# Altium PCB PCB.PcbDoc
Units mm, origin at the board's own origin, x right, y up, seen from the top; angles counter-clockwise.
Board outline 72.01 x 57.28 mm, 2 copper layers (Top Layer, Bottom Layer); 29 components, 33 nets, 129 pads, 73 vias.
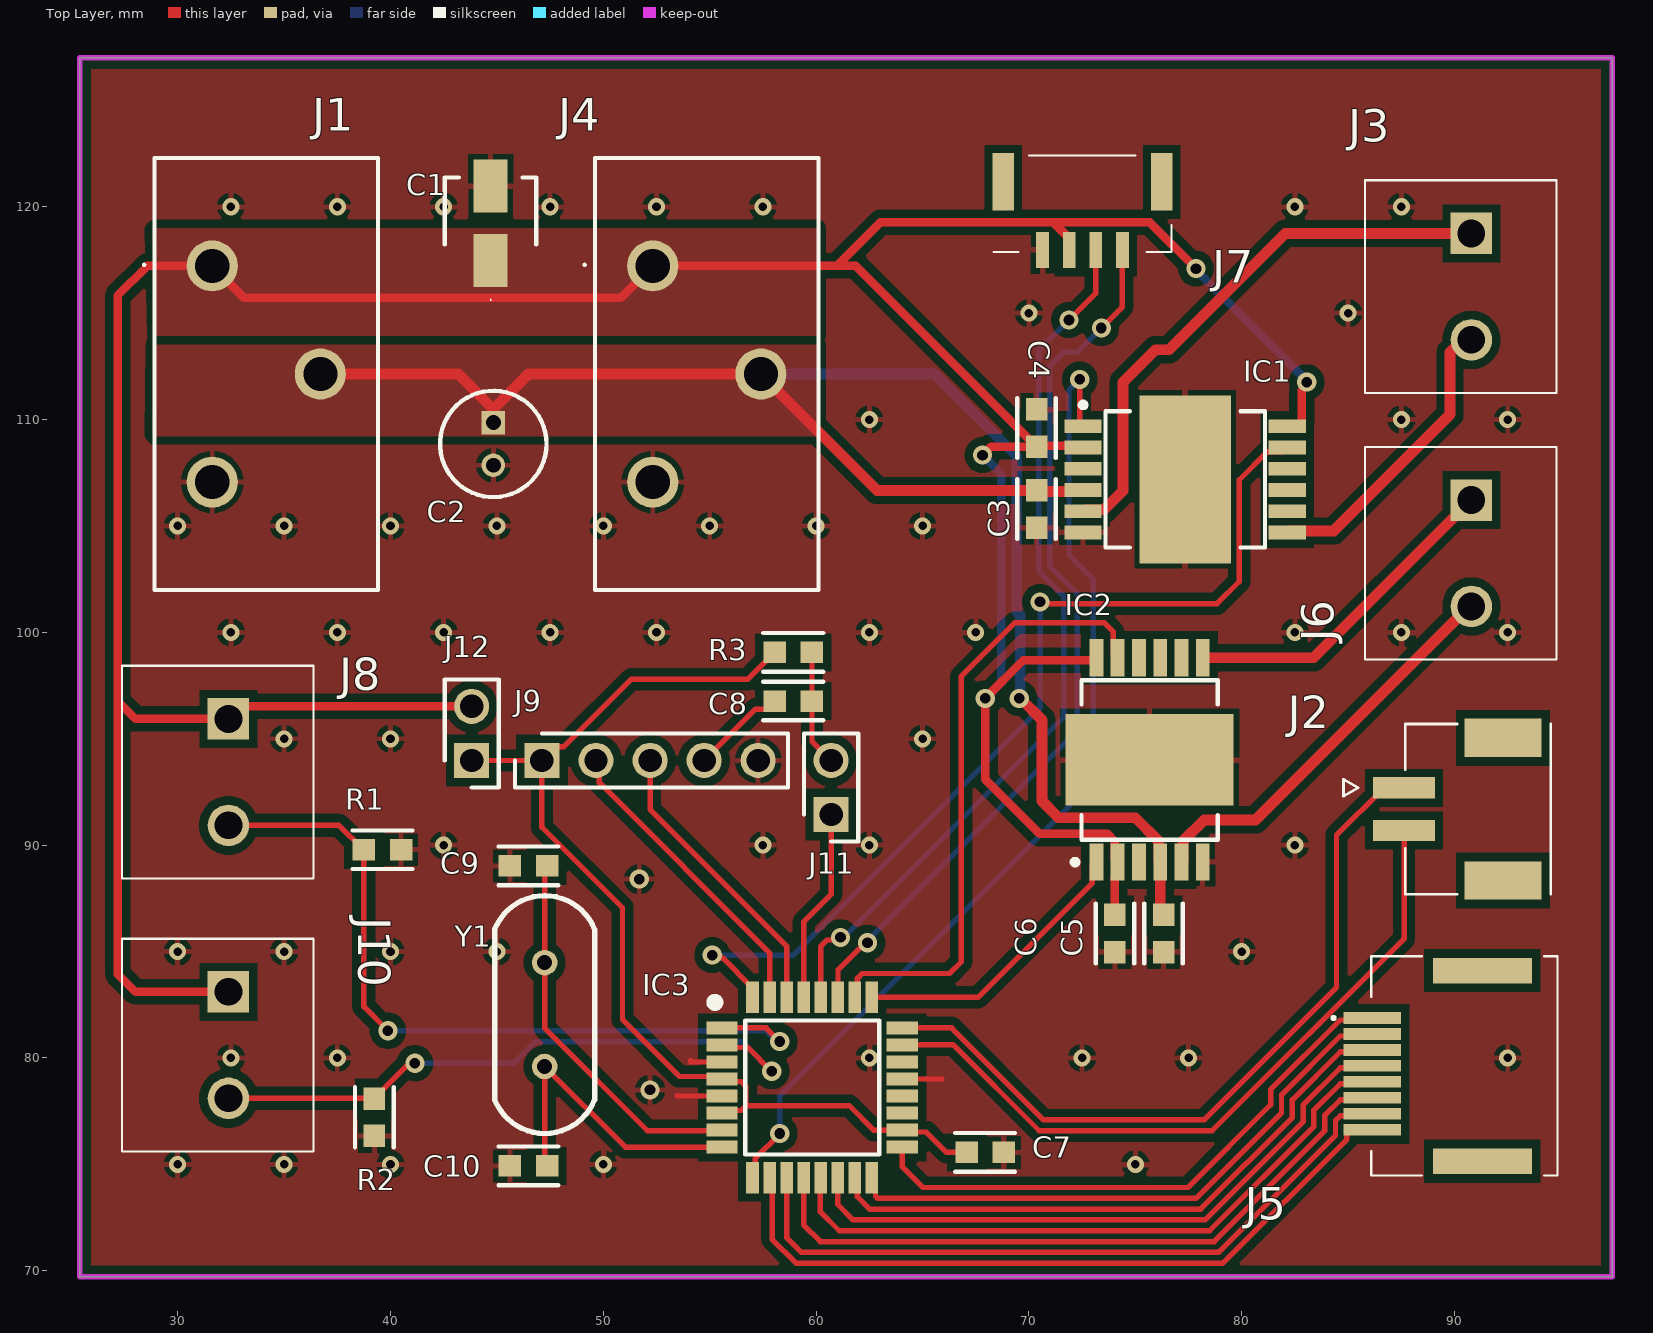
[diagram p0: Top Layer view]
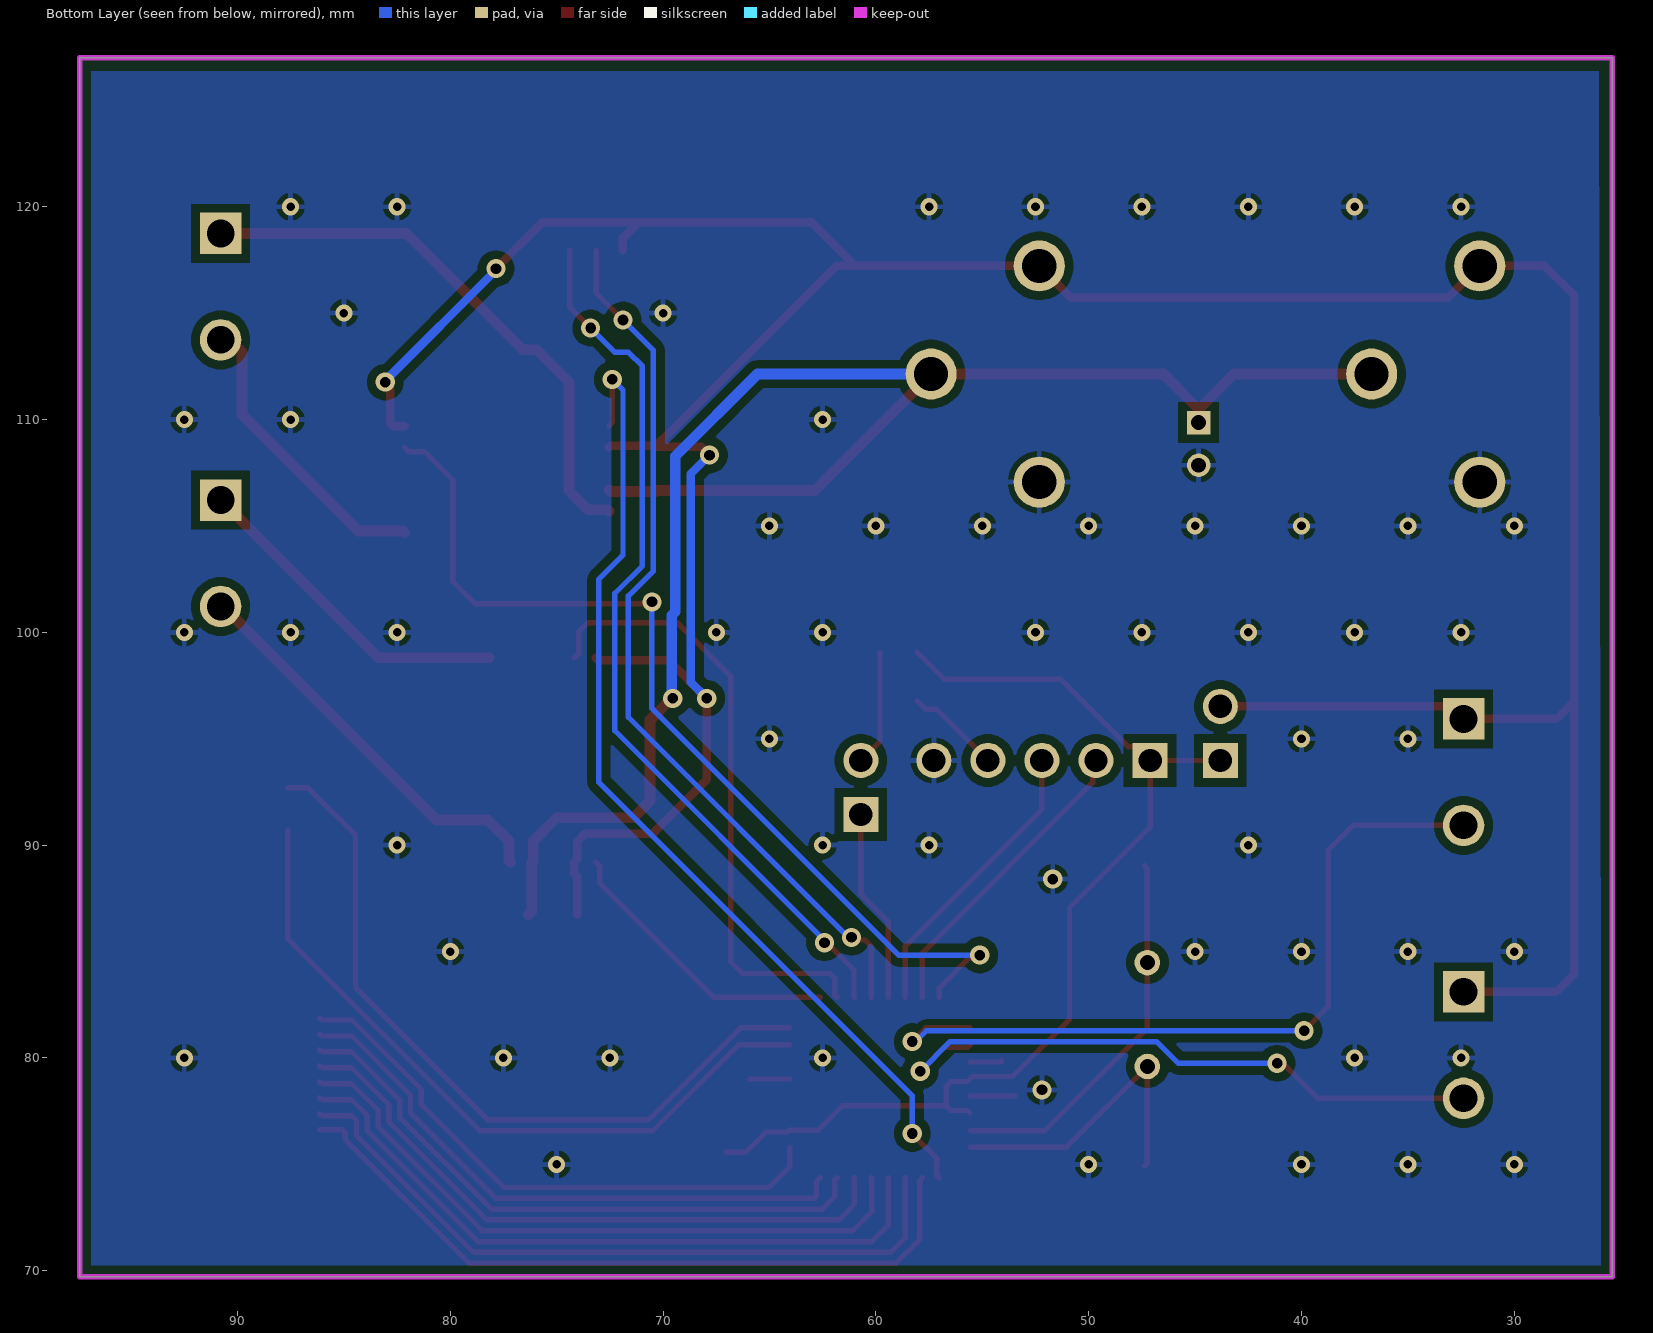
[diagram p1: Bottom Layer view, seen from below]
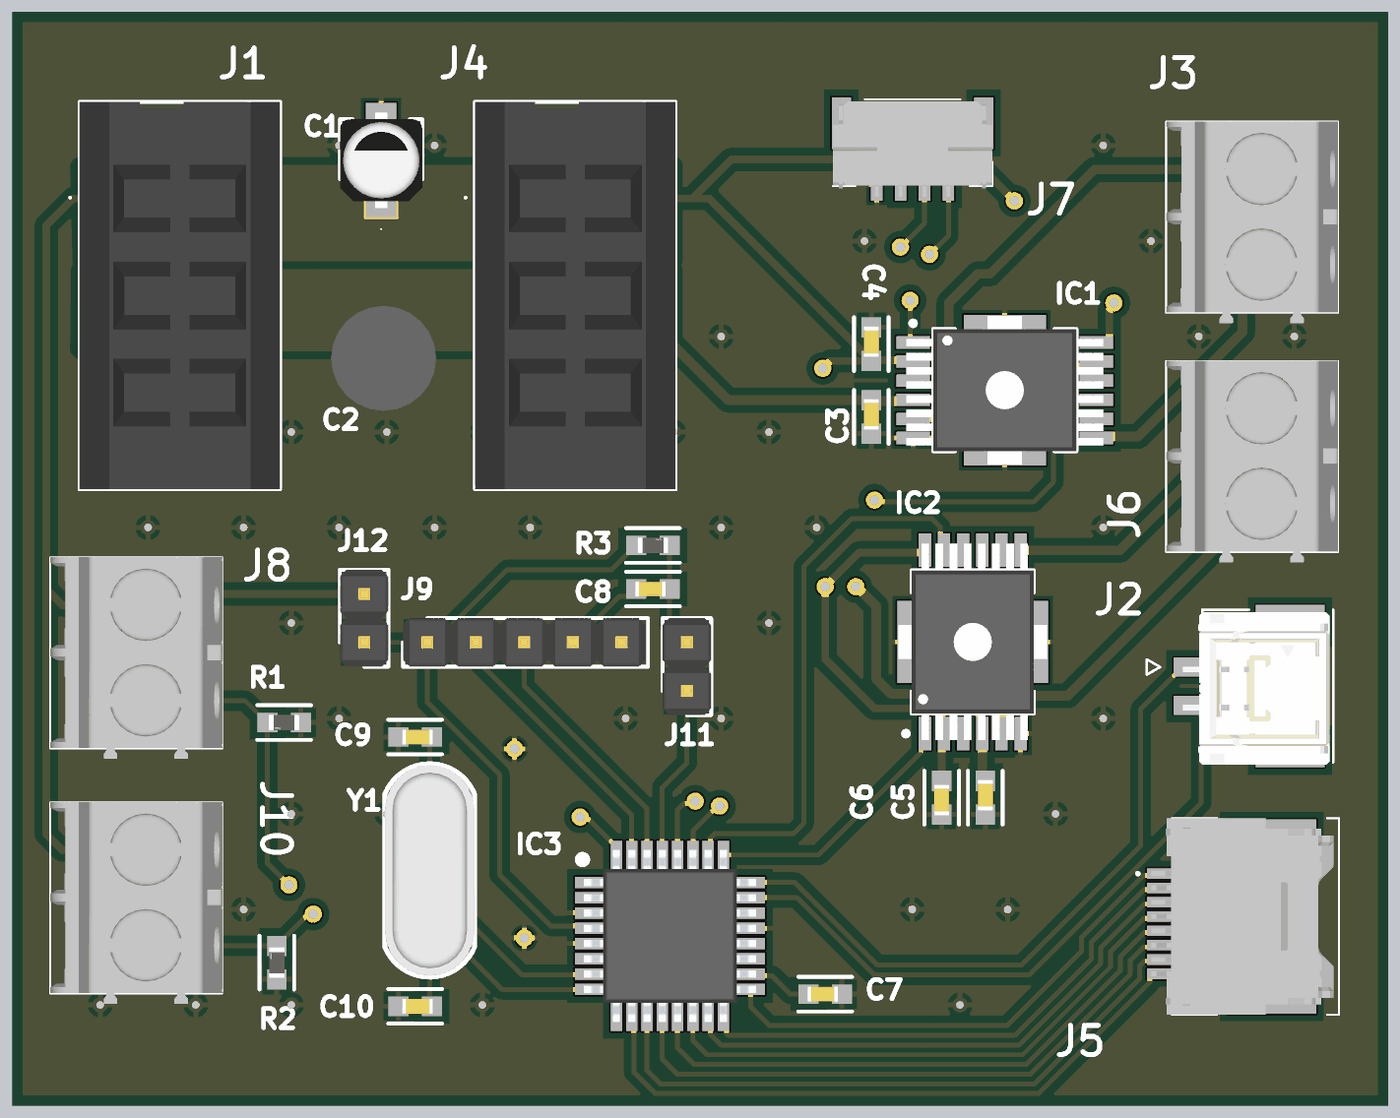
[diagram p2: 3D render of the assembled board from above, using the file's embedded part models]

## Layer stack, top to bottom
Top Solder: solder mask 0.0102, Solder Resist, Dk 3.5
Top Layer: signal copper 0.0356
Dielectric 1: dielectric 0.32, FR-4, Dk 4.8
Bottom Layer: signal copper 0.0356
Bottom Solder: solder mask 0.0102, Solder Resist, Dk 3.5

## Board outline
25.4,69.723 25.4,127 97.409,127 97.409,69.723

## Design rules (kind name [scope] priority, off if disabled: settings)
Clearance [All] p1: gap=0.4 ignorepadtopadclearanceinfootprint=FALSE except(0: Arc-Hole Track-Hole SMDPad-Hole THPad-Hole Via-Hole Fill-Hole Poly-Hole Region-Hole Text-Hole; 0.1: Arc-Text Track-Text SMDPad-SMDPad SMDPad-Text THPad-Text Via-Text Fill-Text Poly-Text Region-Text Text-Text; 0.254: Arc-Arc Arc-Track Arc-SMDPad Arc-Fill Arc-Region Track-Track Track-SMDPad Track-Fill Track-Region SMDPad-Fill SMDPad-Region Fill-Fill Fill-Region Region-Region)
PolygonConnect PolygonConnect_2 [All vs IsNamedPolygon('12V_TOP')] p1: connectstyle=Direct reliefconductorwidth=0.254 reliefentries=4 polygonreliefangle="90 Angle" airgapwidth=0.254
PolygonConnect PolygonConnect_1 [All vs IsNamedPolygon('5V_TOP')] p2: connectstyle=Direct reliefconductorwidth=0.254 reliefentries=4 polygonreliefangle="90 Angle" airgapwidth=0.254
PolygonConnect [All] p3: connectstyle=Relief reliefconductorwidth=0.254 reliefentries=4 polygonreliefangle="90 Angle" airgapwidth=0.254
RoutingVias [All] p1: holewidth=0.711 width=1.27 viastyle="Through Hole" minholewidth=0.711 minwidth=1.27 maxholewidth=0.711 maxwidth=1.27
SolderMaskExpansion [All] p1: expansion=0.102 istentingtop=FALSE
Width Width_6 [InNet('NetIC1_7')] p1: maxlimit=0.5 minlimit=0.254 preferedwidth=0.254 minimp=50.000000 maximp=50.000000 favimp=50.000000
Width Width_5 [InNet('NetIC1_5')] p2: maxlimit=0.5 minlimit=0.254 preferedwidth=0.254 minimp=50.000000 maximp=50.000000 favimp=50.000000
Width Width_4 [InNet('NetIC2_5')] p3: maxlimit=0.5 minlimit=0.254 preferedwidth=0.254 minimp=50.000000 maximp=50.000000 favimp=50.000000
Width Width_3 [InNet('NetIC2_7')] p4: maxlimit=0.5 minlimit=0.254 preferedwidth=0.254 minimp=50.000000 maximp=50.000000 favimp=50.000000
Width Width_2 [InNet('+12V')] p5: maxlimit=0.5 minlimit=0.254 preferedwidth=0.254 minimp=50.000000 maximp=50.000000 favimp=50.000000
Width Width_1 [InNet('+5V')] p6: maxlimit=0.4 minlimit=0.254 preferedwidth=0.254 minimp=50.000000 maximp=50.000000 favimp=50.000000
Width [All] p7: maxlimit=0.254 minlimit=0.254 preferedwidth=0.254
30 further rules are at their usual default settings.

## Components (designator, comment, footprint, x,y, rotation, side; value= is the part's Value field where it differs from the comment)
C1 "EEE-1CA100SR" EEE1AA220WR 44.704,119.225 r90 top
C2 "10uF/25V" CAPPRD200W52D500H1250 44.831,109.855 r270 top
C3 "1uF" 0603C 70.358,105.791 r90 top
C4 "100nF" 0603C 70.358,109.601 r90 top
C5 "1uF" 0603C 76.327,85.852 r90 top
C6 "100nF" 0603C 74.041,85.852 r270 top
C7 "100nF" 0603C 67.945,75.565 r180 top
C8 "100nF" 0603C 58.928,96.774 r180 top
C9 "22pF" 0603C 46.482,89.027 r0 top
C10 "22pF" 0603C 46.482,74.93 r0 top
IC1 "IFX9201SGAUMA1" PG-DSO-12-17 77.343,107.188 r0 top
IC2 "IFX9201SGAUMA1" PG-DSO-12-17 75.668,94.006 r90 top
IC3 "ATMEGA328-AU" QFP80P900X900X120-32N 59.817,78.613 r0 top
J1 "02529031301" 02529031301 31.623,117.221 r90 top
J2 "5024430270" MOLEX_5024430270 90.678,91.694 r270 top
J3 "1935161" 1935161 90.789,118.745 r270 top
J4 "02529031301" 02529031301 52.324,117.221 r90 top
J5 "503148-0890" 5031480890 91.313,79.629 r90 top
J6 "1935161" 1935161 90.789,106.219 r270 top
J7 "502386-0470" 5023860470 72.517,120.142 r0 top
J8 "1935161" 1935161 32.385,95.932 r270 top
J9 "MOLEX,_C-GRID_III,_90120,_8_WAY,_1_ROW,_STRAIGHT_PIN_HEADER" "HDRV8W65P0X254_1X8_2010X249X945P - duplicate" 47.117,93.98 r0 top
J10 "1935161" 1935161 32.385,83.105 r270 top
J11 "PIN_HEADER_2" PINHEADER2 60.706,91.44 r90 top
J12 "PIN_HEADER_2" PINHEADER2 43.815,93.98 r90 top
R1 "100K" 0603R 39.624,89.789 r180 top
R2 "100K" 0603R 39.243,77.216 r90 top
R3 "10K" 0603R 58.928,99.06 r0 top
Y1 "LFXTAL003240" IQD-HC-49-4H 47.244,82.042 r270 top

## Footprints (in the part's own frame and the unit in brackets; to place one, negate y for a bottom-side part, rotate by r counter-clockwise, add the part's x,y. Pads: shape width x height; smd on the part's side, far side on the other; paste and mask are expansions set on the pad)
0603C [mm]
  rect 1.059x1.012 smd paste+0 mask+0: 1(-0.877,0) 2(0.877,0)
  silkscreen extent -1.41,-0.91 1.41,0.91, body extent -0.67,-0.4 0.93,0.4, height 0.6
0603R [mm]
  rect 1.059x1.012 smd paste+0 mask+0: 1(-0.877,0) 2(0.877,0)
  silkscreen extent -1.41,-0.91 1.41,0.91, body extent -1.91,-1.01 1.91,1.01, height 0.25
1935161 [mm]
  rect 1.95x1.95 hole 1.3: 1(0,0)
  round 1.95 hole 1.3: 2(5,0)
  silkscreen extent -2.5,-5 7.5,4, body extent -2.52,-5 8.05,4, height 12.22
02529031301 [mm]
  round 2.4 hole 1.6: 1(0,0) 2(-5.08,-5.08) 3(-10.16,0)
  silkscreen extent -15.22,-7.79 5.06,3.25, body extent -15.22,-7.79 5.06,2.71, height 12.11
5023860470 [mm]
  rect 0.6x1.7 smd: 1(1.875,-2.175) 2(0.625,-2.175) 3(-0.625,-2.175) 4(-1.875,-2.175)
  rect 1x2.7 smd: MP1(3.725,1.025) MP2(-3.725,1.025)
  silkscreen extent -4.18,-2.27 4.18,2.27, body extent -4.18,-2.83 4.18,2.17, height 5.56
5031480890 [mm]
  rect 0.55x2.7 smd: 1(2.25,5.175) 2(1.5,5.175) 3(0.75,5.175) 4(0,5.175) 5(-0.75,5.175) 6(-1.5,5.175) 7(-2.25,5.175) 8(-3,5.175)
  rect 1.2x4.65 smd: MP1(4.48,0) MP2(-4.48,0)
  silkscreen extent -5.15,-3.52 5.15,7.05, body extent -5.15,-3.24 5.15,6.31, height 9.21
CAPPRD200W52D500H1250 [mm]
  rect 1.1x1.1 hole 0.7: 1(0,0)
  round 1.1 hole 0.7: 2(2,0)
  silkscreen extent -1.5,-2.5 3.5,2.5, body extent -1.74,-2.75 3.75,2.75, height 12.5
EEE1AA220WR [mm]
  rect 2.5x1.6 smd: 1(-1.75,0) 2(1.75,0)
  silkscreen extent -3.63,-2.15 2.15,2.15, body extent -2.5,-2.15 2.5,2.15, height 5.78
"HDRV8W65P0X254_1X8_2010X249X945P - duplicate" [mm]
  rect 1.65x1.65 hole 1.1: 1(0,0)
  round 1.65 hole 1.1: 2(2.54,0) 3(5.08,0) 4(7.62,0) 5(10.16,0)
  silkscreen extent -1.27,-1.27 11.56,1.27, body extent -1.27,-1.27 11.43,1.27, height 9.5
IQD-HC-49-4H [mm]
  round 1.2 hole 0.7: 1(-2.44,0) 2(2.44,0)
  silkscreen extent -5.59,-2.35 5.59,2.35, body extent -5.53,-2.35 5.53,2.35, height 5.24
MOLEX_5024430270 [mm]
  rect 1x2.9 smd mask+0.076: 1(-1,-3.05) 2(1,-3.05)
  rect 1.8x3.6 smd mask+0.076: S1(-3.35,1.6) S2(3.35,1.6)
  silkscreen extent -4,-5.9 4,3.85, body extent -3.87,-4.02 4.13,3.68, height 7.7
PG-DSO-12-17 [mm]
  rect 1.75x0.65 smd: 1(-4.8,2.5) 2(-4.8,1.5) 3(-4.8,0.5) 4(-4.8,-0.5) 5(-4.8,-1.5) 6(-4.8,-2.5) 7(4.8,-2.5) 8(4.8,-1.5) 9(4.8,-0.5) 10(4.8,0.5) 11(4.8,1.5) 12(4.8,2.5)
  rect 4.3x7.9 smd: 13(0,0)
  silkscreen extent -4.92,-3.2 3.75,3.62, body extent -5.15,-3.9 5.15,3.9, height 2.45
PINHEADER2 [mm]
  rect 1.65x1.65 hole 1.1: 1(0,0)
  round 1.65 hole 1.1: 2(2.54,0)
  silkscreen extent -1.27,-1.27 3.81,1.27, body extent -1.27,-1.27 3.81,1.27, height 9.5
QFP80P900X900X120-32N [mm]
  rect 1.475x0.6 smd: 1(-4.238,2.8) 2(-4.238,2) 3(-4.238,1.2) 4(-4.238,0.4) 5(-4.238,-0.4) 6(-4.238,-1.2) 7(-4.238,-2) 8(-4.238,-2.8) 17(4.238,-2.8) 18(4.238,-2) 19(4.238,-1.2) 20(4.238,-0.4) 21(4.238,0.4) 22(4.238,1.2) 23(4.238,2) 24(4.238,2.8)
  rect 0.6x1.475 smd: 9(-2.8,-4.238) 10(-2,-4.238) 11(-1.2,-4.238) 12(-0.4,-4.238) 13(0.4,-4.238) 14(1.2,-4.238) 15(2,-4.238) 16(2.8,-4.238) 25(2.8,4.238) 26(2,4.238) 27(1.2,4.238) 28(0.4,4.238) 29(-0.4,4.238) 30(-1.2,4.238) 31(-2,4.238) 32(-2.8,4.238)
  silkscreen extent -4.77,-3.15 3.15,4.2, body extent -4.5,-4.5 4.5,4.5, height 1.2

## Part data
C1: "Capacitor Polarised", Manufacturer_Name=Panasonic, Mouser Part Number=667-EEE-1CA100SR, Arrow Part Number=EEE-1CA100SR, Arrow Price/Stock=https://www.arrow.com/en/products/eee-1ca100sr/panasonic?region=europe, Datasheet Link=http://industrial.panasonic.com/cdbs/www-data/pdf/RDE0000/ABA0000C1145.pdf, Height=5.5mm, Manufacturer_Part_Number=EEE-1CA100SR, Mouser Price/Stock=https://www.mouser.co.uk/ProductDetail/Panasonic/EEE-1CA100SR?qs=ANJC8C65Mw5HUsKv8znGCA%3D%3D
C2: library part 860010472002, "Capacitor Polarised", Manufacturer="Wurth Elektronik", Mouser Part Number=710-860010472002, Datasheet Link=https://www.we-online.com/catalog/datasheet/860010472002.pdf, Height=12.5mm, Manufacturer Part Number=860010472002, Mouser Price/Stock=https://www.mouser.co.uk/ProductDetail/Wurth-Elektronik/860010472002?qs=0KOYDY2FL2%2FyXlauDHcLjg%3D%3D
C3 C5: library part Ceramic_Capacitor, "Cap Ceramic 1uF 25V", Manufacturer=Samsung, Manufacturer Part Number=CL10A105KA8NNNC
C4 C6: library part Ceramic_Capacitor, "Cap Ceramic 100nF", Manufacturer=Kyocera, Manufacturer Part Number=KGM15BR71E104KT
C7 C8: library part Ceramic_Capacitor, "Cap Ceramic 22pF", Manufacturer=Kyocera, Manufacturer Part Number=KGM15BR71E104KT
C9 C10: library part Ceramic_Capacitor, "Cap Ceramic 22pF", Manufacturer=Kyocera, Manufacturer Part Number=KGM15ACG1C220KT
IC1 IC2: "Integrated Circuit", Manufacturer_Name=Infineon, Mouser Part Number=726-IFX9201SGAUMA1, Arrow Part Number=IFX9201SGAUMA1, Arrow Price/Stock=https://www.arrow.com/en/products/ifx9201sgauma1/infineon-technologies-ag?region=nac, Datasheet Link=https://www.infineon.com/dgdl/Infineon-IFX9201SG-DS-v01_01-EN.pdf?fileId=5546d4624cb7f111014d2e8916795dea, Height=2.6mm, Manufacturer_Part_Number=IFX9201SGAUMA1, Mouser Price/Stock=https://www.mouser.co.uk/ProductDetail/Infineon-Technologies/IFX9201SGAUMA1?qs=CVaTMblcXggE9XQ1VnAvKA%3D%3D
IC3: "Integrated Circuit", Manufacturer_Name=Microchip, Mouser Part Number=556-ATMEGA328-AU, Arrow Part Number=ATMEGA328-AU, Arrow Price/Stock=https://www.arrow.com/en/products/atmega328-au/microchip-technology?region=europe, Datasheet Link=https://ww1.microchip.com/downloads/en/DeviceDoc/ATmega48A-PA-88A-PA-168A-PA-328-P-DS-DS40002061B.pdf, Height=1.2mm, Manufacturer_Part_Number=ATMEGA328-AU, Mouser Price/Stock=https://www.mouser.co.uk/ProductDetail/Microchip-Technology/ATMEGA328-AU?qs=lwdSMh1%2FoYJRHuGBjWz9Pg%3D%3D
J1 J4: "Connector", Manufacturer_Name=HARTING, Mouser Part Number=617-02529031301, Datasheet Link=https://b2b.harting.com/files/download/PRD/PDF_DS/PDF_DS_02529031301_EN.pdf, Height=11.6mm, Manufacturer_Part_Number=02529031301, Mouser Price/Stock=https://www.mouser.co.uk/ProductDetail/HARTING/02529031301?qs=pUKx8fyJudBResgWdfe%2F7g%3D%3D
J2: "2.00mm Pitch CLIK-Mate Wire-to-Board PCB Receptacle, Single Row, Vertical, with Cover Tape, 2 Circuits", Package=None, Availability=Unavailable, MP=5024430270, Price=None
J3 J6 J8 J10: "Connector", Manufacturer_Name="Phoenix Contact", Mouser Part Number=651-1935161, Arrow Part Number=1935161, Arrow Price/Stock=https://www.arrow.com/en/products/1935161/phoenix-contact?region=nac, Datasheet Link=https://datasheet.datasheetarchive.com/originals/distributors/SFDatasheet-2/sf-00057459.pdf, Height=11.55mm, Manufacturer_Part_Number=1935161, Mouser Price/Stock=https://www.mouser.co.uk/ProductDetail/Phoenix-Contact/1935161?qs=W3wJikR1%252BS6eKzfFl8Rbew%3D%3D
J5: "Connector", Manufacturer_Name=Molex, Mouser Part Number=538-503148-0890, Arrow Part Number=503148-0890, Arrow Price/Stock=https://www.arrow.com/en/products/5031480890/molex, Datasheet Link=https://www.molex.com/pdm_docs/sd/5031480890_sd.pdf, Height=9.4mm, Manufacturer_Part_Number=503148-0890, Mouser Price/Stock=https://www.mouser.co.uk/ProductDetail/Molex/503148-0890?qs=c8NFF48pVsD%2Fn287kRXVxw%3D%3D
J7: "Connector", Manufacturer_Name=Molex, Mouser Part Number=538-502386-0470, Arrow Part Number=502386-0470, Arrow Price/Stock=https://www.arrow.com/en/products/5023860470/molex, Datasheet Link=https://www.molex.com/pdm_docs/sd/5023860470_sd.pdf, Height=5.75mm, Manufacturer_Part_Number=502386-0470, Mouser Price/Stock=https://www.mouser.co.uk/ProductDetail/Molex/502386-0470?qs=Fn3VdHBzkclcj9HD5XfKig%3D%3D
J9 J11 J12: "Connector", Manufacturer_Name=Molex, Manufacturer_Part_Number=MOLEX, Datasheet Link=https://www.molex.com/pdm_docs/sd/901200128_sd.pdf, Height=9.45mm
R1 R2: library part Resistor, Manufacturer=Yageo, Manufacturer Part Number=RC0603FR-10100KL
R3: library part Resistor, Manufacturer=Yageo, Manufacturer Part Number=RC0603FR-1010KL
Y1: "Crystal or Oscillator", Manufacturer_Name=IQD, Manufacturer_Part_Number=LFXTAL003240

## Via types
v1: diameter 0.8, hole 0.4, Top Layer to Bottom Layer, tented both sides, 54 vias
v2: diameter 0.9, hole 0.5, Top Layer to Bottom Layer, 19 vias

## Nets (pads, with @x,y where several pads share a name; then routed paths per layer and width w, separated by ;. In a path a pad name is that pad's centre, name@x,y a point inside that pad or via, vN(x,y) a via of type N, cw(c..) or ccw(c..) an arc to the next point about the centre after c; other vN are vias at no path point)
+5V: C1.1 C4.1 C6.1 IC1.2 IC1.12 IC2.2 IC2.12 J1.1 J4.1 J7.3 J8.1 J10.1 J12.2 | length 171.4
  Top Layer w0.4: J10.1 28.02,83.105 27.178,83.947 27.178,96.774 ; J12.2 32.973,96.52 J8.1 28.02,95.932 27.178,96.774 ; v2(67.818,108.331) 68.211,108.724 C4.1 ; C4.1@70.358,108.748 70.052,109.054 70.029,109.054 61.861,117.221 60.973,117.221 ; C4.1@70.358,108.763 72.468,108.763 IC1.2 ; J7.3 71.892,118.517 71.138,119.271 ; IC2.12 73.043,98.681 69.725,98.681 v2(67.945,96.901) 67.945,93.091 70.501,90.535 73.681,90.535 74.043,90.173 74.043,89.331 IC2.2 74.168,88.656 74.041,88.529 C6.1 ; v2(77.851,117.094) 75.674,119.271 71.138,119.271 ; IC1.12 82.693,109.688 82.818,109.813 82.818,111.385 83.058,111.625 v2(83.058,111.76) ; 27.178,96.774 27.178,115.824 28.575,117.221 J1.1 33.119,115.725 50.828,115.725 J4.1 60.973,117.221 ; 60.973,117.221 63.023,119.271 71.138,119.271
  Bottom Layer w0.4: v2(67.818,108.331) 68.707,107.442 68.707,97.663 v2(67.945,96.901) ; v2(77.851,117.094) 77.851,117.03 83.058,111.823 v2(83.058,111.76)
+5V_uC: C7.2 IC3.4 IC3.6 IC3.18 J9.1 J12.1 R3.1 | length 50.6
  Top Layer w0.254: J12.1 J9.1 ; IC3.6 55.698,77.532 56.474,77.532 56.698,77.755 ; R3.1 56.781,97.79 51.308,97.79 48.148,94.63 47.767,94.63 J9.1 ; C7.2 66.13,75.565 65.174,76.522 64.146,76.522 IC3.18 62.706,76.613 61.564,77.755 56.698,77.755 ; J9.1 47.117,90.843 50.9,87.06 50.9,81.815 53.583,79.132 55.46,79.132 IC3.4 55.698,78.894 56.474,78.894 56.698,78.671 56.698,77.755
+12V: C2.1 C3.2 C5.2 IC1.4 IC2.4 J1.2 J4.2 | length 79.7
  Top Layer w0.5: J1.2 43.18,112.141 44.831,110.49 46.482,112.141 J4.2 62.877,106.668 C3.2 ; v2(69.547,96.901) 69.596,96.901 70.612,95.885 70.612,92.075 71.393,91.294 74.993,91.294 76.093,90.194 76.093,89.281 IC2.4 76.168,86.888 C5.2 ; C3.2@70.358,106.621 72.475,106.621 IC1.4
  Bottom Layer w0.5: J4.2 65.564,112.141 69.424,108.281 69.424,100.978 69.596,100.806 69.596,96.95 v2(69.547,96.901)
BK: IC3.23 J2.2 | length 34.1
  Top Layer w0.254: IC3.23 66.453,80.613 70.485,76.581 78.613,76.581 87.628,85.596 J2.2
BK_PRES: IC3.1 J8.2 R1.2 | length 37.4
  Top Layer w0.254: J8.2 37.581,90.932 38.724,89.789 R1.2 38.747,82.411 v2(39.878,81.28) ; IC3.1 57.652,81.413 v2(58.293,80.772)
  Bottom Layer w0.254: v2(39.878,81.28) 57.626,81.28 58.134,80.772 v2(58.293,80.772)
DTR: C8.2 J9.4 | length 4.5
  Top Layer w0.254: J9.4 57.152,96.395 57.672,96.395 C8.2
GND: C1.2 C2.2 C3.1 C4.2 C5.1 C6.2 C7.1 C9.1 C10.1 IC1.6 IC1.13 IC2.6 IC2.13 IC3.3 IC3.5 IC3.21 J1.3 J4.3 J7.4 J9.5 R1.1 R2.1 | length 5.6
  Top Layer w0.254: 53.467,78.232 53.467,78.213 IC3.5 ; 54.102,79.883 54.102,79.813 IC3.3 ; IC3.21 65.913,79.013 65.913,78.994
  other v1: 30,75 35,75 40,75 50,75 75,75 32.5,80 37.5,80 62.5,80 72.5,80 77.5,80 92.5,80 30,85 35,85 40,85 45,85 80,85 42.5,90 57.5,90 62.5,90 82.5,90 35,95 40,95 65,95 32.5,100 37.5,100 42.5,100 47.5,100 52.5,100 62.5,100 67.5,100 82.5,100 87.5,100 92.5,100 30,105 35,105 40,105 45,105 50,105 55,105 60,105 65,105 62.5,110 87.5,110 92.5,110 70,115 85,115 32.5,120 37.5,120 42.5,120 47.5,120 52.5,120 57.5,120 82.5,120 87.5,120
  other v2: 52.197,78.499 51.689,88.405
KB1: IC3.17 J5.1 | length 27.1
  Top Layer w0.254: IC3.17 64.055,74.883 65.024,73.914 77.47,73.914 81.359,77.803 81.359,78.514 84.63,81.785 86.044,81.785 J5.1
KB2: IC3.16 J5.2 | length 28
  Top Layer w0.254: IC3.16 62.79,74.202 62.79,73.503 62.887,73.406 77.858,73.406 81.867,77.415 81.867,78.272 84.63,81.035 86.044,81.035 J5.2
KB3: IC3.15 J5.3 | length 29
  Top Layer w0.254: IC3.15 61.936,74.256 61.936,73.48 62.518,72.898 78.069,72.898 82.375,77.204 82.375,78.03 84.63,80.285 86.044,80.285 J5.3
KB4: IC3.14 J5.4 | length 30.1
  Top Layer w0.254: IC3.14 61.017,73.117 61.744,72.39 78.279,72.39 82.883,76.994 82.883,77.788 84.63,79.535 86.044,79.535 J5.4
KB5: IC3.13 J5.5 | length 31.3
  Top Layer w0.254: IC3.13 60.198,74.356 60.198,72.771 61.087,71.882 78.49,71.882 83.391,76.783 83.391,77.546 84.63,78.785 86.044,78.785 J5.5
KB6: IC3.12 J5.6 | length 32.5
  Top Layer w0.254: IC3.12 59.417,72.155 60.198,71.374 78.7,71.374 83.899,76.573 83.899,77.304 84.63,78.035 86.044,78.035 J5.6
KB7: IC3.11 J5.7 | length 33.7
  Top Layer w0.254: IC3.11 58.617,71.558 59.309,70.866 78.911,70.866 84.407,76.362 84.407,77.062 84.63,77.285 86.044,77.285 J5.7
KB8: IC3.10 J5.8 | length 34.4
  Top Layer w0.254: IC3.10 57.936,74.256 57.936,71.477 59.055,70.358 79.121,70.358 84.937,76.174 84.937,76.481 85.085,76.629 J5.8
NetC8_1: C8.1 J11.2 R3.2 | length 5.5
  Top Layer w0.254: R3.2 C8.1 59.805,94.881 J11.2
NetC9_2: C9.2 IC3.7 Y1.1 | length 18
  Top Layer w0.254: C9.2 47.244,88.912 Y1.1 47.244,81.407 52.07,76.581 55.547,76.581 IC3.7
NetC10_2: C10.2 IC3.8 Y1.2 | length 14.6
  Top Layer w0.254: C10.2 47.244,75.045 Y1.2 51.033,75.813 IC3.8
NetIC1_1: IC1.1 IC3.9 | length 47.1
  Top Layer w0.254: IC3.9 57.136,74.494 57.136,75.27 58.293,76.427 v2(58.293,76.454) ; v2(72.39,111.887) 72.39,109.841 IC1.1
  Bottom Layer w0.254: v2(58.293,76.454) 58.293,78.232 73.025,92.964 73.025,102.489 71.882,103.632 71.882,111.379 v2(72.39,111.887)
NetIC1_5: IC1.5 J3.1 | length 26.3
  Top Layer w0.5: IC1.5 72.618,105.763 73.531,105.763 74.422,106.654 74.422,111.76 75.946,113.284 76.581,113.284 82.042,118.745 J3.1@90.424,118.745
NetIC1_7: IC1.7 J3.2 | length 13.8
  Top Layer w0.5: IC1.7 82.218,104.763 84.316,104.763 89.789,110.236 89.789,113.157 J3.2@90.424,113.792
NetIC1_11: IC1.11 IC3.32 | length 45.7
  Top Layer w0.254: v2(55.118,84.836) 55.242,84.712 55.593,84.712 57.017,83.289 IC3.32 ; v2(70.524,101.434) 70.612,101.346 78.845,101.346 79.883,102.384 79.883,107.167 81.206,108.49 81.945,108.49 IC1.11
  Bottom Layer w0.254: v2(55.118,84.836) 58.928,84.836 70.524,96.432 v2(70.524,101.434)
NetIC2_1: IC2.1 IC3.25 | length 13.7
  Top Layer w0.254: IC3.25 67.611,82.851 72.97,88.21 72.97,89.008 IC2.1
NetIC2_5: IC2.5 J6.2 | length 19.1
  Top Layer w0.5: IC2.5 77.243,89.281 77.243,90.194 78.235,91.186 80.645,91.186 90.678,101.219 J6.2
NetIC2_7: IC2.7 J6.1 | length 15.7
  Top Layer w0.5: IC2.7 83.376,98.806 J6.1
NetIC2_11: IC2.11 IC3.26 | length 29.2
  Top Layer w0.254: IC3.26 61.936,82.97 61.936,83.746 62.159,83.97 66.272,83.97 66.825,84.522 66.825,97.94 69.342,100.457 73.533,100.457 73.97,100.02 73.97,99.004 IC2.11
RESET: IC3.29 J11.1 | length 9.1
  Top Layer w0.254: IC3.29 59.417,86.398 60.706,87.687 J11.1
RX: IC3.30 J9.3 | length 13.8
  Top Layer w0.254: J9.3 52.197,91.682 58.617,85.262 IC3.30
SC: IC3.24 J2.1 | length 36
  Top Layer w0.254: IC3.24 66.371,81.413 70.695,77.089 78.232,77.089 84.455,83.312 84.455,90.471 86.678,92.694 J2.1
SC_PRES: IC3.2 J10.2 R2.2 | length 30.2
  Top Layer w0.254: J10.2 R2.2@39.231,78.105 ; R2.2 39.243,78.116 40.883,79.756 v2(41.148,79.756) ; IC3.2@55.5,80.693 IC3.2 55.698,80.494 56.793,80.494 v2(57.912,79.375)
  Bottom Layer w0.254: v2(41.148,79.756) 45.804,79.756 46.82,80.772 56.515,80.772 v2(57.912,79.375)
SCL: IC3.28 J7.2 | length 42
  Top Layer w0.254: IC3.28 60.217,85.24 60.522,85.546 61.019,85.546 v2(61.143,85.669) ; v2(71.882,114.681) 73.142,115.941 J7.2
  Bottom Layer w0.254: v2(61.143,85.669) 61.285,85.669 71.628,96.012 71.628,101.712 70.47,102.87 70.47,113.269 v2(71.882,114.681) v2@71.882,114.506
SDA: IC3.27 J7.1 | length 42.2
  Top Layer w0.254: IC3.27 61.03,82.864 61.03,84.144 62.3,85.414 v2(62.418,85.414) ; v2(73.406,114.3) 74.392,115.286 J7.1
  Bottom Layer w0.254: v2(62.418,85.414) 62.418,85.532 72.263,95.377 72.263,101.839 70.978,103.124 70.978,112.507 71.628,113.157 72.263,113.157 v2(73.406,114.3)
TX: IC3.31 J9.2 | length 14.5
  Top Layer w0.254: J9.2 49.811,93.826 49.811,92.937 57.817,84.931 IC3.31
pads on no net: IC1.3 IC1.8 IC1.9 IC1.10 IC2.3 IC2.8 IC2.9 IC2.10 IC3.19 IC3.20 IC3.22 J2.S1 J2.S2 J5.MP1 J5.MP2 J7.MP1 J7.MP2

## Polygon pours and split planes (outlines as drawn)
+12V on Top Layer "12V_TOP" (solid, pour order 0): 28.883,113.526 60.071,113.526 60.071,109.22 28.829,109.22
+5V on Top Layer "5V_TOP" (solid, pour order 2): 28.829,118.999 60.071,118.999 60.071,113.919 28.956,113.919
GND on Top Layer "GND_TOP" (solid, pour order 3): 25.654,126.746 25.654,69.85 97.155,69.85 97.155,126.873
GND on Bottom Layer "GND_BOT" (solid, pour order 4): 26.035,126.365 97.028,126.365 97.028,70.104 25.908,70.104

## Keep-outs
Keep-Out Layer:
  the board outline again, w0.254